# Altium PCB EUS1_Outline_5_trial07.PcbDoc (part 2 of 3)
Units mm, origin at the board's own origin, x right, y up, seen from the top; angles counter-clockwise.
Board outline 95.45 x 90.3 mm, 6 copper layers (Top Layer, Routing 1, GND, EPS_VCC, Routing 2, Bottom Layer), stack 2.257 mm thick; 247 components, 187 nets, 935 pads, 315 vias.
Unrouted connection lines stored in the file: 34.
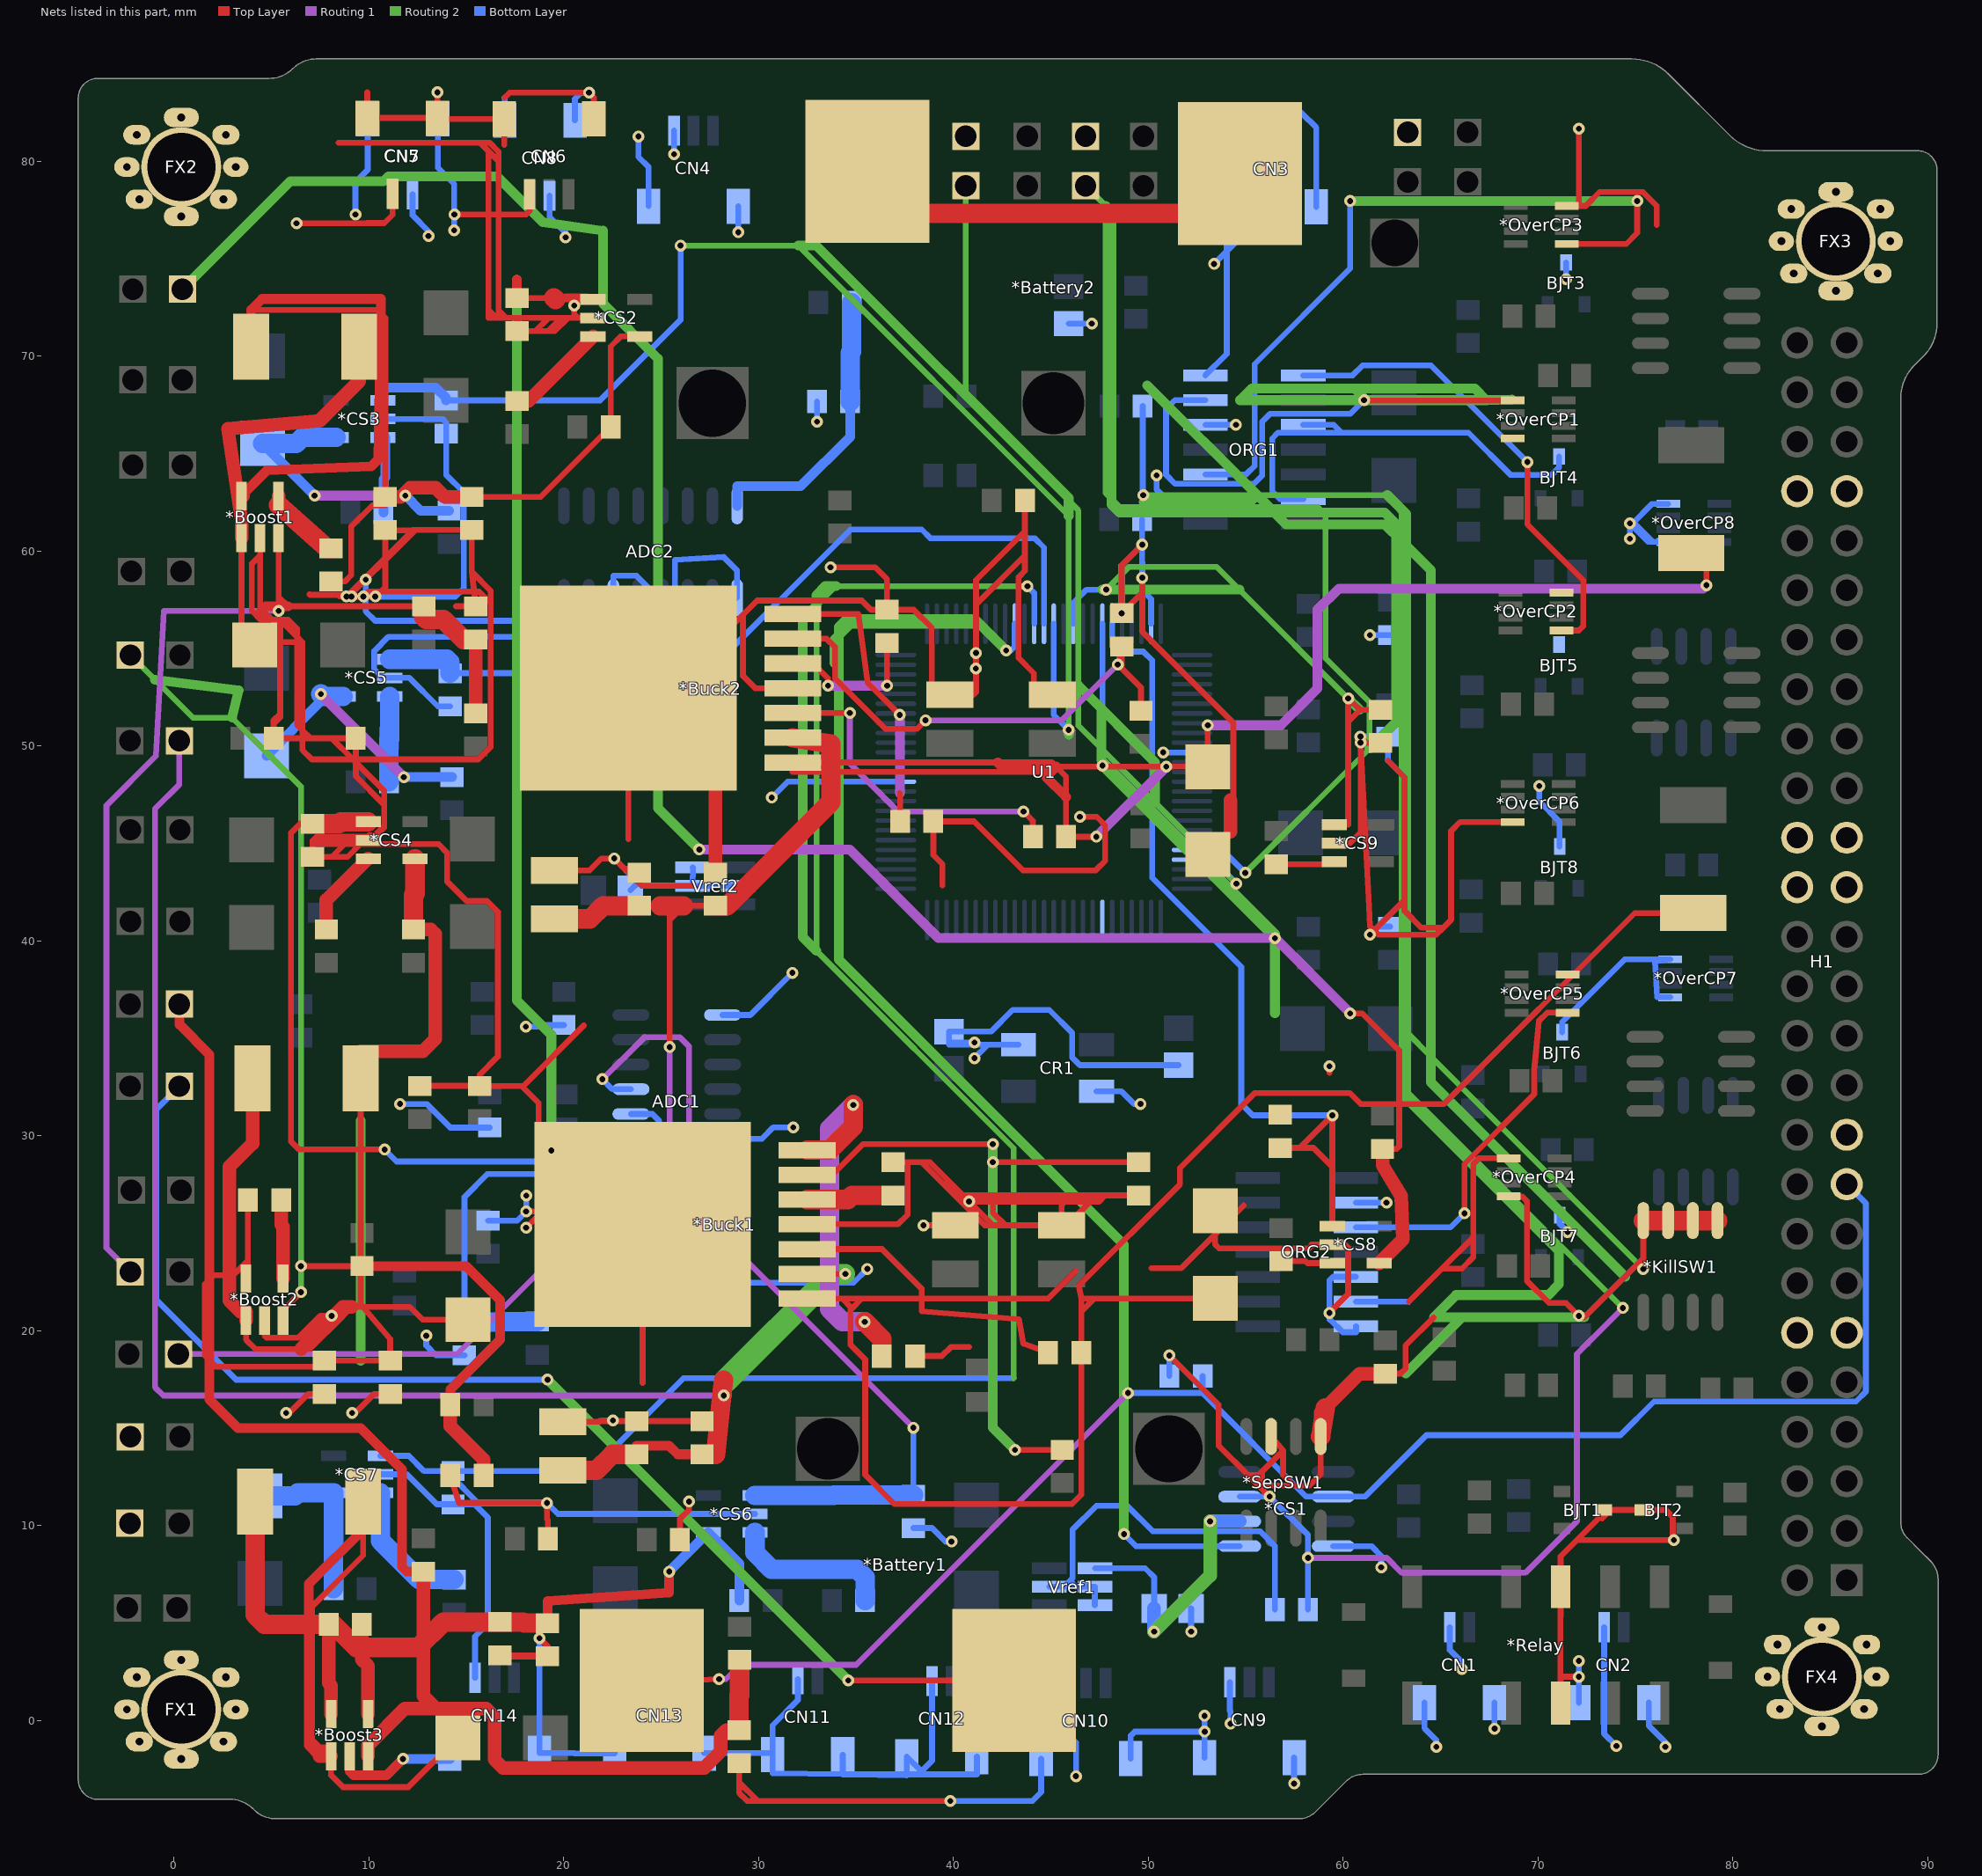
[diagram p6: the nets of this part, all layers, seen from the top]

## Via types
v1: diameter 0.61, hole 0.305, Top Layer to Bottom Layer, 314 vias
v2: diameter 0.61, hole 0.3, Top Layer to Bottom Layer, 1 vias

## Nets (pads, with @x,y where several pads share a name; then routed paths per layer and width w, separated by ;. In a path a pad name is that pad's centre, name@x,y a point inside that pad or via, vN(x,y) a via of type N, cw(c..) or ccw(c..) an arc to the next point about the centre after c; other vN are vias at no path point) (continued)
GND: *Boost1.2 *Boost2.2 *Boost3.2 *Buck1.4 *Buck1.8 *Buck2.4 *Buck2.8 *CS1.4 *CS2.2 *CS3.2 *CS4.2 *CS5.2 *CS6.2 *CS7.2 *CS8.2 *CS9.2 *OverCP1.4 *OverCP2.4 *OverCP3.4 *OverCP4.4 *OverCP5.4 *OverCP6.4 *OverCP7.1 *OverCP7.4 *OverCP8.1 *OverCP8.4 *Relay.4 *Relay.9 ADC1.9 ADC1.14 ADC2.9 ADC2.14 BJT1.3 BJT2.3 BJT3.3 BJT4.3 BJT5.3 BJT6.3 BJT7.3 BJT8.3 C1.1 C2.1 C3.1 C4.1 C5.1 C6.1 C7.1 C9.1 C10.1 C11.1 C12.1 C13.1 C15.1 C16.1 C17.1 C18.1 C19.1 C21.2 C22.1 C23.1 C24.2 C25.2 C27.1 C28.2 C29.1 C30.1 C31.2 C32.2 C34.1 C35.1 C36.1 C37.1 C38.1 CN1.2 CN1.3 CN1.4 CN2.2 CN2.3 CN2.4 CN3.3 CN3.4 CN3.5 CN4.3 CN4.4 CN4.5 CN5.2 CN5.3 CN5.4 CN6.3 CN6.4 CN6.5 CN7.2 CN7.3 CN7.4 CN8.2 CN8.3 CN8.4 CN9.3 CN9.4 CN9.5 CN10.3 CN10.4 CN10.5 CN11.2 CN11.3 CN11.4 CN12.2 CN12.3 CN12.4 CN13.3 CN13.4 CN13.5 CN14.3 CN14.4 CN14.5 CR1.2 CR1.4 D17.1 D18.1 FX1.1 FX1.2 FX1.3 FX1.4 FX1.5 FX1.6 FX1.7 FX1.8 FX1.9 FX2.1 FX2.2 FX2.3 FX2.4 FX2.5 FX2.6 FX2.7 FX2.8 FX2.9 FX3.1 FX3.2 FX3.3 FX3.4 FX3.5 FX3.6 FX3.7 FX3.8 FX3.9 FX4.1 FX4.2 FX4.3 FX4.4 FX4.5 FX4.6 FX4.7 FX4.8 FX4.9 H1.11 H1.12 H1.19 H1.29 H1.30 H1.31 H1.32 H1.45 H1.46 ORG1.2 ORG1.5 ORG1.7 ORG1.10 ORG1.13 ORG2.2 ORG2.5 ORG2.7 R10.2 R15.2 R18.2 R22.2 R24.2 R27.2 R29.2 R32.2 R36.2 R38.2 R41.2 R43.2 R46.2 R50.2 R52.2 R55.2 R62.2 R63.2 R68.2 R72.2 R73.2 R78.2 R79.1 U1.11 U1.32 U1.62 U1.81 U1.99 Vref1.2 Vref1.3 Vref1.5 Vref2.2 Vref2.3 Vref2.5 W2.1 W4.1 W16.2 W18.2 W19.2 | length 1002.7
  Top Layer w0.3: *Boost1.2@4.42,60.672 4.42,59.771 ; *Boost2.2@4.648,20.515 4.648,19.74 4.75,19.639 6.397,19.639 7.515,20.756 v1(8.095,20.756) ; v1(5.763,15.778) 5.93,15.778 6.903,16.751 C9.1@7.722,16.751 ; v1(6.291,76.814) 10.792,76.814 10.818,76.84 ; 8.45,80.954 15.689,80.954 ; 8.501,57.675 8.501,57.739 ; v1(9.141,15.778) 9.308,15.778 10.281,16.751 C10.1@11.1,16.751 ; 9.924,76.84 10.818,76.84 ; CN5.4@9.924,82.202 CN5.4@9.924,82.224 ; 9.924,83.534 CN5.4@9.924,82.224 ; *CS4.2@9.976,45.161 *CS4.2@9.767,45.161 ; C3.1@10.846,61.074 C3.1@10.846,61.066 ; CN5.2@11.224,78.327 11.224,77.246 10.818,76.84 ; v1(13.524,83.534) CN5.3@13.524,82.224 ; R36.2@14.186,12.573 14.623,11.155 v1(19.144,11.155) 19.144,10.338 19.19,10.292 C18.1@19.19,9.322 ; v1(14.394,77.271) 16.147,77.271 ; 14.465,57.163 R22.2@15.494,57.163 15.407,57.917 ; 16.95,80.845 CN6.5@16.95,82.174 ; CN6.5@16.95,82.176 CN6.5@16.95,82.174 ; 16.981,83.262 17.239,83.52 v1(21.303,83.52) 21.55,83.272 CN6.4@21.55,82.176 ; v1(18.077,25.278) 18.712,25.913 *Buck1.8@18.712,26.116 ; v1(18.077,26.116) *Buck1.8@18.712,26.116 ; CN6.3@18.25,78.302 18.25,77.449 18.073,77.271 16.655,77.271 ; v1(18.756,4.221) 19.177,3.8 C16.1@19.177,3.34 ; C28.2@19.533,43.612 21.328,43.612 21.942,44.226 v1(22.598,44.226) 23.132,43.693 ; C21.2@19.964,15.316 21.798,15.316 ; v1(20.541,72.598) 20.541,72.166 20.749,71.958 ; 21.049,35.666 17.933,32.55 17.848,32.55 ; *CS2.2@21.508,71.958 20.749,71.958 ; v1(22.533,15.392) 21.917,15.392 21.879,15.354 ; 23.317,45.222 *Buck2.8@23.317,52.959 27.788,52.959 27.788,55.308 29.202,56.723 ; C29.1@23.829,42.996 23.601,43.223 C29.1@23.876,43.497 ; 24.054,17.31 *Buck1.8@24.054,25.451 24.054,26.116 *Buck1.8@18.712,26.116 ; C19.1@25.972,9.271 25.972,10.341 26.441,10.811 v1(26.441,11.23) ; 26.619,42.824 24,42.824 C29.1@23.327,43.497 ; R50.2@29.007,-2.197 29.007,-3.17 ; *Buck2.4@31.763,52.959 29.837,52.959 29.202,53.594 29.202,56.723 ; *Buck1.4@32.499,25.451 37.152,25.451 37.66,25.959 37.66,28.537 37.559,28.638 ; v1(33.698,59.161) 35.992,59.161 36.601,58.552 R72.2@36.601,56.985 ; R62.2@36.906,28.638 37.559,28.638 ; C27.1@38.037,18.694 39.413,18.694 39.875,19.156 40.81,19.156 ; v1(38.468,25.4) C24.2@40.107,25.4 ; 39.446,42.847 39.446,43.926 38.976,44.396 C34.1@38.976,46.126 41.064,46.126 43.574,43.616 47.312,43.616 47.795,44.099 47.795,45.928 47.363,46.36 v1(46.5,46.36) ; v1(39.845,-4.136) 29.972,-4.136 ; R79.1@43.675,62.586 43.675,61.015 ; C32.2@45.085,52.629 44.137,52.629 44.137,53.726 43.35,54.513 43.35,58.658 43.675,58.983 43.675,59.771 ; R63.2@49.505,26.937 47.795,26.937 ; 49.695,57.861 v1(48.641,56.807) 48.641,59.272 v1(49.695,60.326) ; v1(49.7,58.628) 49.7,55.859 54.374,51.186 54.374,45.748 54.221,45.596 D18.1@53.061,44.435 ; 50.157,23.195 51.681,23.195 53.442,24.955 ; D17.1@53.442,26.151 53.442,24.955 ; 54.907,26.421 53.442,24.955 ; R68.2@56.769,31.077 R68.2@57.15,31.077 ; 58.373,24.409 58.453,24.409 ; v1(59.301,20.909) 60.266,21.874 60.266,24.257 60.114,24.409 *CS8.2@59.455,24.409 58.453,24.409 ; 59.301,33.228 v1(59.301,33.558) ; *CS9.2@59.557,45.009 60.363,45.009 60.901,45.547 v1@60.901,50.058 ; v1(60.897,50.482) 61.227,50.152 ; v1(60.901,50.17) v1@60.901,50.152 ; v1(61.379,40.314) 61.597,40.533 ; R78.2@61.925,50.152 61.227,50.152 ; 62.306,49.247 63.157,48.397 63.157,42.092 ; *OverCP4.4@68.515,26.889 69.196,26.889 69.436,26.649 69.436,22.56 70.579,21.417 71.442,21.417 v1(72.103,20.756) ; *OverCP6.4@68.718,46.091 66.007,46.091 65.55,45.634 65.55,41.076 65.143,40.67 ; *OverCP3.4@71.49,77.708 72.103,77.708 ; v1(72.103,2.24) 71.29,2.24 71.171,2.121 *Relay.4@71.171,0.889 71.163,0.889 71.163,5.331 71.171,5.339 *Relay.9@71.171,6.858 71.171,8.412 72.009,9.25 ; v1(72.103,81.666) 72.103,77.708 ; 76.103,76.733 76.103,77.708 75.395,78.417 73.168,78.417 72.459,77.708 72.103,77.708 ; 4.42,57.096 5.047,56.469 ; 4.42,57.096 4.42,56.926 4.877,56.469 ; 4.42,57.096 4.42,59.771 ; 4.42,59.771 4.005,59.357 4.005,56.926 4.463,56.469 4.877,56.469 ; 4.877,56.469 5.047,56.469 ; 5.047,56.469 5.453,56.469 ; 5.047,56.469 5.453,56.062 5.453,55.326 ; 5.118,51.135 5.453,51.47 5.453,51.648 ; 5.118,51.135 C7.1@5.118,50.394 6.596,50.394 ; 5.118,51.135 5.118,51.313 5.453,51.648 ; 5.453,51.648 5.453,55.326 ; 5.453,55.326 6.317,55.326 ; 5.453,56.469 6.317,55.605 ; 5.453,56.469 5.86,56.469 6.317,56.012 6.317,55.605 ; 6.317,55.326 6.596,55.326 ; 6.317,55.326 6.317,51.084 6.596,50.805 ; 6.317,55.326 6.317,55.605 ; 6.317,55.605 6.596,55.326 ; 6.596,50.394 6.596,49.789 7.079,49.306 9.187,49.306 ; 6.596,50.394 6.596,50.805 ; 6.596,50.394 7.007,50.394 ; 6.596,50.805 6.596,55.326 ; 6.596,50.805 7.007,50.394 ; 6.977,57.764 6.952,57.79 6.952,57.764 6.977,57.764 ; 6.977,57.764 7.003,57.739 8.501,57.739 ; 6.977,57.764 8.501,57.764 ; 7.007,50.394 8.099,50.394 ; 7.112,44.836 R32.2@7.112,44.31 8.107,44.31 ; 7.112,44.836 7.239,44.963 8.76,44.963 ; 7.112,44.836 7.112,44.937 ; 7.112,44.937 7.336,45.161 8.958,45.161 ; 7.112,44.937 7.112,45.14 7.315,45.344 *CS4.2@9.949,45.344 ; 8.099,50.394 C6.1@9.335,50.394 9.335,49.306 ; 8.099,50.394 9.187,49.306 ; 8.107,44.31 8.916,44.31 *CS4.2@9.568,44.963 ; 8.107,44.31 8.76,44.963 ; 8.501,57.739 8.501,57.764 ; 8.501,57.739 v1@8.933,57.739 ; 8.501,57.764 v1@8.958,57.764 ; 8.76,44.963 *CS4.2@9.568,44.963 ; 8.76,44.963 8.958,45.161 ; v1@8.933,57.739 v1@9.035,57.739 ; v1@8.933,57.739 v1(8.857,57.663) v1(9.111,57.663) ; v1@8.933,57.739 v1@8.958,57.764 ; 8.958,45.161 *CS4.2@9.767,45.161 ; v1@8.958,57.764 v1@9.009,57.764 ; v1@8.958,57.764 v1@8.984,57.79 ; v1@8.984,57.79 v1@9.009,57.764 ; v1@8.984,57.79 v1@9.788,58.594 ; v1@9.009,57.764 v1@9.077,57.764 ; v1@9.009,57.764 v1@9.035,57.739 ; v1@9.035,57.739 9.052,57.739 v1@9.077,57.764 ; v1@9.035,57.739 v1(9.111,57.663) ; v1@9.077,57.764 v1(9.847,58.534) ; v1(9.111,57.663) v1(9.72,57.663) ; 9.187,49.306 9.335,49.158 ; 9.187,49.306 9.335,49.306 ; 9.335,49.158 10.787,47.706 10.787,46.99 ; 9.335,49.158 9.335,48.442 10.787,46.99 ; 9.335,49.158 9.335,49.306 ; 9.335,49.306 15.613,49.306 16.248,49.941 16.248,57.332 ; *CS4.2@9.568,44.963 *CS4.2@9.767,45.161 ; *CS4.2@9.568,44.963 13.581,44.963 14.013,44.531 14.013,43.058 15.029,42.042 16.07,42.042 16.629,41.483 16.629,34.066 15.697,33.134 C13.1@15.697,32.567 ; v1(9.72,57.663) 9.974,57.917 10.617,57.917 ; v1(9.72,57.663) v1(10.33,57.663) 10.363,57.663 10.617,57.917 ; *CS4.2@9.767,45.161 *CS4.2@9.949,45.344 ; v1@9.788,58.594 v1(9.847,58.534) ; v1@9.788,58.594 10.846,59.652 ; v1(9.847,58.534) 10.846,59.533 ; CN5.4@9.924,82.224 CN5.3@13.524,82.224 ; *CS4.2@9.949,45.344 10.025,45.42 10.33,45.42 10.787,45.877 ; *CS4.2@9.949,45.344 10.33,45.344 10.787,45.801 10.787,45.877 ; 10.617,57.917 10.846,58.145 10.846,59.533 ; 10.617,57.917 15.407,57.917 ; 10.787,45.877 10.787,46.99 ; 10.846,59.533 12.379,61.066 ; 10.846,59.533 10.846,59.652 ; 10.846,59.652 12.26,61.066 ; 10.846,59.652 C3.1@10.846,61.066 ; C3.1@10.846,61.066 12.26,61.066 ; 12.26,61.066 12.268,61.074 12.387,61.074 ; 12.26,61.066 12.379,61.066 ; 12.379,61.066 12.387,61.074 ; 12.387,61.074 C4.1@15.291,61.074 15.291,58.925 ; CN5.3@13.524,82.224 CN5.3@13.524,82.202 13.524,82.174 CN6.5@16.95,82.174 ; 15.291,58.925 16.248,57.967 16.248,57.332 ; 15.291,58.925 15.407,57.917 ; 15.407,57.917 15.664,57.917 16.248,57.332 ; 15.689,80.954 16.147,80.497 16.147,77.271 ; 15.689,80.954 15.715,80.954 ; C13.1@15.697,32.55 C13.1@15.697,32.567 ; C13.1@15.697,32.55 C12.1@12.624,32.55 12.624,32.567 C13.1@15.697,32.567 ; C13.1@15.697,32.55 17.848,32.55 ; 15.715,80.954 16.655,80.015 ; 15.715,80.954 16.197,80.954 16.655,80.497 16.655,80.015 ; 16.147,72.369 16.558,71.958 ; 16.147,72.369 16.147,71.963 16.151,71.958 16.558,71.958 ; 16.147,72.369 16.147,77.271 ; 16.147,77.271 16.655,77.271 ; 16.558,71.958 16.659,71.958 ; 16.655,72.369 17.066,71.958 ; 16.655,72.369 16.655,71.963 16.659,71.958 ; 16.655,72.369 16.655,77.271 ; 16.655,77.271 16.655,80.015 ; 16.659,71.958 17.066,71.958 ; 17.066,71.958 17.747,71.958 ; 17.747,71.958 17.602,71.814 R18.2@17.602,71.285 18.547,71.285 ; 17.747,71.958 19.22,71.958 ; 17.848,32.55 18.712,31.686 *Buck1.8@18.712,26.116 ; 18.547,71.285 19.22,71.958 ; 18.547,71.285 19.207,71.285 ; C16.1@19.177,3.34 C16.1@19.177,3.289 19.177,3.281 16.739,3.281 C15.1@16.739,3.34 C16.1@19.177,3.34 ; 19.207,71.285 19.88,71.958 ; 19.207,71.285 19.537,71.285 20.211,71.958 ; 19.22,71.958 19.88,71.958 ; 19.88,71.958 20.211,71.958 ; 20.211,71.958 20.749,71.958 ; 21.798,15.316 21.836,15.354 21.879,15.354 ; 21.798,15.316 21.841,15.316 21.879,15.354 ; 21.879,15.354 C22.1@23.749,15.354 ; 23.132,43.693 C29.1@23.327,43.497 ; 23.132,43.693 23.876,43.693 C29.1@23.876,43.497 ; C29.1@23.327,43.497 C29.1@23.876,43.497 ; C22.1@23.749,15.354 C23.1@27.102,15.354 27.102,15.372 23.749,15.372 C22.1@23.749,15.354 ; 29.007,-3.17 29.972,-4.136 ; 29.007,-3.17 29.007,-3.712 29.431,-4.136 29.972,-4.136 ; 29.202,56.723 29.939,57.459 35.304,57.459 35.778,56.985 R72.2@36.601,56.985 ; R72.2@36.601,56.985 37.965,56.985 38.905,56.045 38.905,52.629 C31.2@39.827,52.629 41.034,52.629 41.166,52.76 v1(41.166,54.767) 41.166,57.261 ; 37.559,28.638 38.372,28.638 ; 38.372,28.638 40.073,26.937 ; 38.372,28.638 38.795,28.638 40.497,26.937 ; 40.073,26.937 40.497,26.937 ; 40.073,26.937 41.61,25.4 42.034,25.4 ; 40.497,26.937 v1(40.81,26.624) ; 40.497,26.937 46.05,26.937 ; v1(40.81,26.624) 42.034,25.4 ; v1(40.81,26.624) 42.034,26.624 ; 41.166,57.261 43.675,59.771 ; 41.166,57.261 41.166,58.506 43.675,61.015 ; 42.034,25.4 42.673,25.4 ; 42.034,26.624 42.034,26.04 42.673,25.4 ; 42.034,26.624 45.738,26.624 ; 42.673,25.4 C25.2@45.56,25.4 ; 43.675,59.771 43.675,61.015 ; C25.2@45.56,25.4 C25.2@45.568,25.4 45.814,25.4 47.038,26.624 ; C25.2@45.56,25.4 45.56,26.446 45.738,26.624 ; 45.738,26.624 46.05,26.937 ; 45.738,26.624 47.038,26.624 ; 46.05,26.937 47.35,26.937 ; 47.038,26.624 47.35,26.937 ; 47.038,26.624 47.177,26.624 ; 47.177,26.624 47.49,26.937 ; 47.177,26.624 47.482,26.624 47.795,26.937 ; 47.35,26.937 47.49,26.937 ; 47.49,26.937 47.795,26.937 ; 53.442,24.955 53.442,24.414 53.639,24.216 58.26,24.216 58.453,24.409 ; v1@60.901,50.058 61.332,41.742 61.384,40.746 61.597,40.533 ; v1@60.901,50.058 60.897,50.152 v1@60.901,50.152 ; v1@60.901,50.058 v1@60.901,50.152 ; v1@60.901,50.152 61.227,50.152 ; 61.597,40.533 61.816,40.314 64.788,40.314 65.143,40.67 ; 61.597,40.533 63.157,42.092 ; 63.157,42.092 63.157,41.539 64.026,40.67 65.143,40.67 ; 72.009,9.25 v1(76.98,9.25) 76.929,9.301 76.929,10.439 76.573,10.795 BJT2.3@75.379,10.795 BJT1.3@73.728,10.795 ; 72.009,9.25 73.209,10.45 ; 73.209,10.45 BJT1.3@73.554,10.795 ; 73.209,10.45 73.195,10.465 73.195,10.795 BJT1.3@73.389,10.795 BJT1.3@73.554,10.795 ; 73.209,10.45 73.297,10.363 BJT1.3@73.728,10.795 ; BJT1.3@73.554,10.795 BJT1.3@73.728,10.795
  Top Layer w0.5: *Boost3.2@9.017,-1.837 9.017,-2.612 9.22,-2.815 10.914,-2.815 v1(11.752,-1.977)
  Top Layer w0.7: C30.1@27.788,43.497 *Buck2.8@27.788,52.959 ; 54.221,45.596 54.221,47.23
  Bottom Layer w0.3: v1(9.314,77.273) 9.314,78.932 9.946,79.563 CN7.3@9.946,82.176 ; v1(9.847,58.534) 9.847,56.901 10.33,56.418 18.864,56.418 22.555,56.654 ADC2.14@22.555,57.619 22.555,58.729 23.741,58.729 24.3,58.171 24.3,56.926 ; v1(10.33,57.663) 14.445,57.663 14.877,58.094 14.877,63.004 13.97,63.911 R27.2@13.97,66.027 13.97,66.591 13.784,66.777 *CS3.2@10.725,66.777 ; *CS7.2@10.598,12.624 11.956,12.624 13.492,11.087 R55.2@14.326,11.087 15.427,11.087 16.108,10.407 16.108,4.958 15.456,4.306 CN14.3@15.456,2.191 ; v1(11.605,31.628) 12.974,31.628 14.185,30.416 R38.2@16.205,30.416 ; CN7.2@12.246,78.302 12.246,77.229 13.066,76.408 v1(13.066,76.165) ; v1(12.951,19.74) 12.951,19.234 13.452,18.732 R43.2@14.91,18.732 ; CN7.4@13.546,82.176 13.546,79.668 14.387,78.827 v1(14.387,76.46) ; R41.2@14.173,52.032 13.548,52.032 12.087,53.492 *CS5.2@11.081,53.492 10.711,53.492 10.281,53.923 10.281,54.869 11.014,55.602 23.589,55.602 24.3,56.313 24.3,56.926 ; 14.186,12.573 15.604,11.155 v1(19.144,11.155) 19.707,10.592 *CS6.2@29.826,10.592 ; R24.2@16.129,25.641 17.618,25.641 18.088,26.111 v1(18.088,26.924) ; CN8.3@16.981,82.1 16.981,83.262 ; v1(18.057,35.59) 18.668,35.59 18.752,35.674 R52.2@20.015,35.674 ; v1(18.756,4.221) CN14.4@18.756,-1.684 20.553,-1.684 20.566,-1.697 22.615,-1.697 CN13.5@22.615,-1.684 22.615,-1.321 23.915,-0.021 CN13.3@23.915,2.191 ; CN8.2@19.281,78.225 19.281,77.153 20.102,76.332 v1(20.102,76.089) ; CN8.4@20.581,82.1 20.581,83.205 20.896,83.52 v1(21.303,83.52) ; v1(22.598,44.226) C35.1@23.829,42.996 ; C35.1@23.429,42.596 C35.1@23.829,42.996 ; v1(23.843,81.274) 23.843,80.222 24.367,79.697 CN4.5@24.367,77.691 ; v1(25.667,80.359) CN4.3@25.667,81.566 ; Vref2.3@26.619,43.774 26.637,43.774 26.637,43.312 26.619,43.294 Vref2.2@26.619,42.824 ; CN13.4@27.215,-1.684 27.215,-1.672 CN11.4@30.727,-1.672 ; ADC1.14@28.156,29.845 30.183,29.845 30.767,30.429 v1(31.789,30.429) ; ADC1.9@28.156,36.195 29.579,36.195 v1(31.742,38.359) ; R29.2@28.346,22.695 29.303,22.695 29.541,22.456 34.879,22.456 v1(35.588,23.165) ; ADC2.9@28.905,57.619 28.905,59.001 28.212,59.695 25.722,59.542 25.722,56.926 25.291,56.494 24.732,56.494 24.3,56.926 ; Vref2.5@28.956,42.824 Vref2.2@26.619,42.824 ; v1(28.967,76.359) CN4.4@28.967,77.691 ; v1(30.679,47.346) 31.5,48.166 U1.62@37.053,48.166 ; CN11.2@32.027,2.115 32.027,1.046 30.727,-0.254 CN11.4@30.727,-1.672 ; v1(33.007,66.637) R15.2@33.007,67.666 ; CN11.3@34.327,-1.76 34.327,-2.766 ; R46.2@37.948,9.868 38.906,9.868 39.6,9.174 v1(39.906,9.174) ; CN12.2@38.91,2.013 38.91,-2.073 38.372,-2.612 CN12.4@37.61,-1.862 37.61,-2.77 ; v1(39.845,-4.136) 44.061,-4.136 44.509,-3.687 CN10.5@44.509,-1.963 ; v1(41.084,33.979) 41.776,34.671 ; v1(41.089,34.777) C37.1@39.776,34.777 ; v1(41.153,53.972) U1.81@41.153,56.266 ; CN12.3@41.21,-1.862 41.21,-2.77 37.61,-2.77 ; CR1.2@43.346,34.671 41.776,34.671 ; Vref1.5@44.933,6.858 45.687,6.858 45.992,7.163 ; CN10.3@45.809,1.912 45.809,-0.649 46.296,-1.136 v1(46.296,-2.867) ; C36.1@45.923,71.669 v1(47.105,71.669) ; Vref1.3@47.269,5.908 47.262,5.908 Vref1.2@47.262,6.858 ; Vref1.2@47.269,6.858 Vref1.2@47.262,6.858 ; CR1.4@47.346,32.271 48.632,32.271 49.275,31.628 v1(49.607,31.628) ; v1(48.641,56.807) 48.641,59.272 v1(49.695,60.326) R10.2@49.695,61.62 49.697,60.326 v1(49.7,58.628) 49.7,57.989 50.153,57.536 U1.99@50.153,56.266 ; CN10.4@49.109,-1.963 49.109,-0.783 49.313,-0.58 v1@52.891,-0.58 ; v1(50.429,63.881) 50.429,63.163 50.93,62.662 ORG1.2@52.934,62.662 ; v1(50.771,49.666) U1.11@52.253,49.666 ; C38.1@51.562,33.619 46.5,33.619 46.093,34.026 46.093,35.285 44.925,36.454 43.045,36.454 41.933,35.342 C37.1@39.776,35.342 C37.1@39.776,34.777 ; v1(52.207,4.559) C2.1@52.207,5.74 ; CN9.5@52.891,-1.912 v1@52.891,-0.58 ; v1(52.891,0.232) v1@52.891,-0.58 ; v1(52.9,-0.58) v1@52.891,-0.58 ; ORG1.5@52.934,66.472 v1(54.508,66.472) ; ORG1.7@52.934,69.012 54.034,70.113 54.034,75.383 ; v1(53.383,74.731) 54.034,75.383 ; CN9.3@54.191,1.962 54.191,0.494 54.221,0.465 v1(54.221,-0.174) ; C1.1@56.502,5.69 56.502,8.945 55.74,9.707 50.233,9.707 48.938,11.003 47.338,11.003 46.119,9.784 46.119,7.29 45.992,7.163 ; v1(57.491,-3.244) CN9.4@57.491,-1.912 ; ORG1.13@57.963,62.662 56.761,62.662 56.37,63.053 56.37,65.78 56.66,66.07 59.936,66.07 ; ORG1.10@57.963,66.472 59.534,66.472 59.936,66.07 ; CN3.4@58.634,77.666 58.634,81.723 57.879,82.478 57.472,82.478 56.787,81.793 56.787,80.091 ; *CS1.4@59.499,8.941 61.46,8.941 61.961,8.44 v1(61.961,7.853) ; ORG2.7@60.655,20.218 60.673,20.218 60.673,19.918 59.987,19.918 59.352,20.553 59.301,20.553 v1(59.301,20.909) 59.301,22.555 59.504,22.758 ORG2.5@60.655,22.758 ; ORG2.2@60.655,26.568 v1(62.23,26.568) ; v1(60.897,50.482) C5.1@62.306,50.482 62.306,49.247 63.157,48.397 63.157,42.092 61.794,40.729 ; v1(61.379,40.314) 61.794,40.729 ; v1(61.379,55.689) C17.1@62.408,55.689 ; C11.1@62.408,40.729 61.794,40.729 ; CN1.4@64.178,0.907 64.178,-0.397 64.788,-1.006 v1(64.788,-1.355) ; CN1.2@65.478,4.782 65.478,3.614 66.108,2.984 v1(66.108,2.645) ; v1(67.778,-0.425) CN1.3@67.778,0.907 ; v1(70.071,47.947) 70.071,47.157 71.12,46.108 BJT8.3@71.12,44.839 ; BJT4.3@71.095,64.854 71.095,64.292 70.714,63.911 68.598,63.911 66.439,66.07 59.936,66.07 ; BJT7.3@71.12,25.916 71.12,25.466 v1(71.526,25.059) ; BJT6.3@71.247,35.314 71.247,35.832 74.465,39.05 *OverCP7.4@76.795,39.05 76.014,38.943 76.13,37.1 *OverCP7.1@76.795,37.1 ; v1(71.45,73.954) BJT3.3@71.45,74.811 ; CN2.4@72.103,0.907 v1(72.103,3.052) ; CN2.2@73.403,4.782 73.403,-0.687 v1(74.033,-1.317) ; v1(74.722,60.63) 74.722,61.276 v1@74.793,61.348 ; CN2.3@75.703,0.907 75.703,-0.28 76.545,-1.122 v1(76.545,-1.355) ; *OverCP8.1@76.693,60.468 75.913,60.468 ; *OverCP8.4@76.693,62.418 75.863,62.418 v1@74.867,61.422 ; C35.1@23.829,42.996 24,42.824 Vref2.2@26.619,42.824 ; CN11.4@30.727,-1.672 CN11.4@30.727,-1.76 30.727,-2.713 34.312,-2.766 34.327,-2.766 ; 34.327,-2.766 34.602,-2.77 ; 34.327,-2.766 34.327,-2.77 34.602,-2.77 ; 34.602,-2.77 37.596,-2.815 37.61,-2.815 37.61,-2.77 ; 34.602,-2.77 37.61,-2.77 ; C37.1@39.776,34.777 39.776,34.671 41.776,34.671 ; 45.992,7.163 46.296,6.858 Vref1.2@47.262,6.858 ; 54.034,75.383 CN3.5@54.034,77.666 54.034,78.668 55.05,79.684 56.38,79.684 56.787,80.091 ; 54.034,75.383 56.787,78.135 56.787,80.091 ; v1@74.793,61.348 v1(74.719,61.422) v1@74.867,61.422 ; v1@74.793,61.348 75.673,60.468 75.913,60.468 ; v1@74.793,61.348 v1@74.867,61.422 ; v1@74.867,61.422 74.959,61.422 75.913,60.468
  Bottom Layer w0.5: v1(11.752,-1.977) 14.156,-1.977 CN14.5@14.156,-1.684
ISA_X: *CS2.1 ADC1.3 R18.1 | length 56.6
  Top Layer w0.3: R18.1@17.602,72.987 19.499,72.987 20.016,72.987 20.098,73.069 21.19,73.069 *CS2.1@21.351,72.908 ; 19.578,72.908 *CS2.1@21.351,72.908 ; *CS2.1@21.508,72.908 *CS2.1@21.351,72.908
  Top Layer w0.5: R18.1@17.602,72.987 17.602,73.911
  Top Layer w1: 19.499,72.987 19.578,72.908
  Routing 2 w0.5: 17.602,73.911 17.594,73.911 17.594,36.936 19.372,35.158 v1(19.372,29.241)
  Bottom Layer w0.5: v1(19.372,29.241) 20.953,29.241 21.557,29.845 ADC1.3@23.456,29.845
ISA_Y: *CS4.1 ADC1.4 R32.1 | length 45.7
  Top Layer w0.3: R32.1@7.112,46.012 6.477,46.012 6.012,45.547 6.012,29.697 6.418,29.291 v1(10.813,29.291)
  Top Layer w1: R32.1@7.112,46.012 8.476,46.012 8.575,46.111 *CS4.1@9.976,46.111
  Bottom Layer w0.3: v1(10.813,29.291) 11.425,28.679 19.426,28.679 21.608,26.497 24.148,26.497 24.91,27.259 24.91,30.759 24.554,31.115 ADC1.4@23.456,31.115
ISA_Z: *CS6.1 ADC1.5 R46.1 | length 43.1
  Routing 1 w0.3: v1(21.989,32.898) 24.138,35.047 25.97,35.047 26.443,34.574 26.443,26.521 v1(37.948,15.016)
  Bottom Layer w0.3: v1(21.989,32.898) 22.501,32.385 ADC1.5@23.456,32.385 ; R46.1@37.948,11.57 v1(37.948,15.016)
  Bottom Layer w1: *CS6.1@29.826,11.542 33.85,11.542 33.878,11.57 R46.1@37.948,11.57
LOAD1_STATUS: *OverCP3.1 ORG1.3 | length 38.5
  Top Layer w0.3: *OverCP3.1@71.49,75.758 74.541,75.758 75.1,76.317 v1(75.1,77.957)
  Routing 2 w0.5: v1(60.368,77.957) v1(75.1,77.957)
  Bottom Layer w0.3: ORG1.3@52.934,63.932 55.034,63.932 55.466,64.364 55.466,69.595 60.368,74.498 v1(60.368,77.957)
LOAD2_STATUS: *OverCP1.1 ORG1.6 | length 54.9
  Top Layer w0.3: v1(61.079,67.746) 61.099,67.726 67.38,67.726 *OverCP1.1@68.718,67.726
  Routing 2 w0.5: 67.38,67.726 67.364,67.742 ; 68.668,67.776 67.364,67.742 ; 60.592,68.339 55.318,68.339 54.72,67.742 v1@61.19,67.742 ; 60.592,68.339 66.766,68.339 67.364,67.742 ; 60.592,68.339 v1@61.19,67.742 ; v1@61.19,67.742 67.364,67.742
  Bottom Layer w0.3: ORG1.6@52.934,67.742 51.376,67.742 50.919,67.285 50.919,63.911 51.376,63.454 55.44,63.454 55.847,63.86 55.847,66.629 56.253,67.035 60.368,67.035 v1(61.079,67.746)
LOAD3_STATUS: *OverCP2.1 ORG1.8 | length 24.6
  Top Layer w0.3: v1(69.464,64.569) 69.464,61.369 72.331,58.501 72.331,56.15 72.103,55.921 *OverCP2.1@71.211,55.921
  Bottom Layer w0.3: ORG1.8@57.963,69.012 60.49,69.012 61.003,69.524 64.508,69.524 v1(69.464,64.569)
LOAD5_STATUS: *OverCP5.1 ORG2.3 | length 18.9
  Top Layer w0.3: v1(66.235,26.014) 66.235,28.554 69.817,32.136 69.817,33.355 70.045,35.88 70.477,36.312 *OverCP5.1@71.541,36.312
  Bottom Layer w0.3: ORG2.3@60.655,25.298 65.52,25.298 v1(66.235,26.014)
LOAD6_STATUS: *OverCP4.1 ORG2.6 | length 16
  Top Layer w0.3: 63.386,21.488 63.391,21.493 65.077,23.18 ; *OverCP4.1@68.515,28.839 66.972,28.839 66.693,28.559 66.693,24.795 ; 65.077,23.18 66.101,23.18 66.693,23.771 66.693,24.795 ; 65.077,23.18 66.693,24.795
  Bottom Layer w0.3: ORG2.6@60.655,21.488 63.386,21.488
M_VSA_X: ADC2.8 R14.2 R15.1 | length 14.8
  Bottom Layer w0.5: ADC2.8@28.905,62.319 28.905,63.327 32.169,63.327 34.709,65.867 R15.1@34.709,67.666
  Bottom Layer w1: R15.1@34.709,67.666 34.709,70.159 34.785,70.236 R14.2@34.785,72.746
M_VSA_Y: ADC1.1 R28.2 R29.1 | length 9.9
  Bottom Layer w0.5: R28.2@25.298,22.771 25.926,22.771 27.704,20.993 R29.1@28.346,20.993
  Bottom Layer w1: ADC1.1@23.456,27.305 24.846,27.305 25.298,26.852 R28.2@25.298,22.771
M_VSA_Z: ADC1.2 R42.2 R43.1 | length 19.8
  Bottom Layer w0.3: R43.1@14.91,20.434 14.91,26.852 16.086,28.029 18.702,28.029 19.192,27.538 21.455,27.538 22.492,28.575 ADC1.2@23.456,28.575
  Bottom Layer w1: R43.1@14.91,20.434 16.756,20.434 16.782,20.46 R42.2@18.644,20.46
MISO: U1.22 W16.1 | length 52
  Routing 2 w0.3: W16.1@40.64,78.74 40.64,67.866 46.423,62.082 46.423,53.091 46.423,51.033 50.36,47.096 v1(54.526,42.931)
  Routing 2 w0.5: 46.423,53.091 50.36,49.154 50.36,47.096
  Bottom Layer w0.3: U1.22@52.253,44.166 53.312,44.166 54.526,42.952 v1(54.526,42.931)
MOSI: U1.21 W18.1 | length 95.7
  Routing 2 w0.3: W18.1@46.787,78.74 47.82,77.706 47.82,62.971 48.125,62.666 48.532,62.26 58.692,62.26 58.971,61.981 59.108,61.843 59.108,54.488 61.359,52.237 61.359,49.865 v1(54.983,43.489)
  Routing 2 w0.5: 47.82,77.706 48.125,77.402 48.125,62.666 48.125,62.387 48.532,61.981 58.971,61.981 62.146,61.981 62.73,61.396 62.73,51.236 61.359,49.865
  Bottom Layer w0.3: U1.21@52.253,44.666 53.806,44.666 v1(54.983,43.489)
Net*Battery1_1: *Battery1.1 *CS1.2 H1.17 R12.1 | length 85.3
  Top Layer w0.3: *Battery1.1@24.007,2.044 26.383,2.044 v1(27.983,2.113)
  Routing 1 w0.3: v1(27.983,2.113) 28.336,2.113 29.072,2.849 35.019,2.849 v1(48.968,16.799)
  Bottom Layer w0.3: v1(48.968,16.799) 52.794,16.799 ; R12.1@52.794,17.678 52.794,16.799 ; H1.17@85.852,27.508 86.835,26.525 86.835,16.87 86.327,16.362 75.964,16.362 74.236,14.635 64.284,14.635 61.13,11.481 *CS1.2@59.499,11.481 58.112,11.481 52.794,16.799
Net*Battery1_2: *Battery1.2 W3.2 | length 63.6
  Top Layer w0.3: v1(34.612,2.044) *Battery1.2@43.117,2.044
  Routing 2 w0.5: v1(19.177,17.48) v1(34.612,2.044)
  Bottom Layer w0.3: W3.2@0.279,32.537 -0.897,31.361 -0.897,21.569 3.193,17.48 v1(19.177,17.48)
Net*Battery2_3: *Battery2.3 *Battery2.4 | length 22.3
  Top Layer w0.3: *Battery2.3@35.59,77.318 *Battery2.3@35.59,79.475 ; *Battery2.4@52.896,77.318 54.712,79.133 *Battery2.4@54.712,79.375
  Top Layer w1: *Battery2.3@35.59,77.318 *Battery2.4@52.896,77.318
Net*Boost1_1: *Boost1.1 D5.1 L1.1 | length 20.8
  Top Layer w0.3: *Boost1.1@3.47,60.672 3.47,55.85 D5.1@4.151,55.169
  Top Layer w0.7: *Boost1.1@3.47,60.672 3.47,61.577 2.77,66.273 7.474,66.68 9.506,68.712 L1.1@9.506,70.485
Net*Boost1_3: *Boost1.3 C8.1 R21.2 R22.1 W5.2 | length 61.7
  Top Layer w0.3: v1(5.37,56.926) 5.37,57.163 5.37,57.653 ; *Boost1.3@5.37,60.672 5.37,57.653 ; R21.2@12.827,57.163 5.86,57.163 5.37,57.653
  Top Layer w0.5: 4.463,56.926 4.699,57.163 5.37,57.163 5.86,57.163
  Top Layer w0.7: C8.1@15.494,51.676 R22.1@15.494,55.461
  Top Layer w1: R21.2@12.827,57.163 12.827,56.621 12.954,56.494 13.835,56.494 14.869,55.461 R22.1@15.494,55.461
  Routing 1 w0.3: W5.2@-2.235,23.012 -3.462,24.239 -3.462,46.944 -0.922,49.484 -0.516,56.926 v1(5.37,56.926)
Net*Boost1_4: *Boost1.4 R19.1 | length 4
  Top Layer w0.7: *Boost1.4@5.37,62.362 *Boost1.4@5.37,62.822
  Top Layer w1: *Boost1.4@5.37,62.362 7.872,60.134 R19.1@8.052,60.134
Net*Boost1_5: *Boost1.5 *CS2.4 C3.2 C4.2 L1.2 R17.1 R19.2 | length 66.7
  Top Layer w0.3: L1.2@3.956,70.485 3.956,72.268 4.058,72.369 10.439,72.369 10.616,72.192 10.846,71.963 C3.2@10.846,62.776 10.846,62.348 10.189,62.348 9.092,61.25 9.092,58.755 8.77,58.433 R19.2@8.052,58.433 ; C4.2@15.291,62.776 18.821,62.776 R17.1@22.416,66.37 22.416,70.495 22.928,71.008 *CS2.4@23.908,71.008
  Top Layer w0.5: *Boost1.5@3.47,62.822 3.537,62.89 4.787,64.14 10.127,64.343 10.486,64.702 10.616,72.192 10.629,72.934 4.52,72.934 3.956,72.369 3.956,72.268
  Top Layer w0.7: *Boost1.5@3.47,62.822 3.537,62.822 *Boost1.5@3.537,62.89 ; C3.2@10.846,62.776 11.659,62.776 12.133,63.251 13.429,63.251 13.903,62.776 C4.2@15.291,62.776
Net*Boost2_1: *Boost2.1 D10.1 L2.1 | length 30.7
  Top Layer w0.3: *Boost2.1@3.698,20.515 3.698,19.537 4.181,19.055 6.52,19.055 6.977,19.055 8.679,20.756 8.679,20.782 9.111,21.214 12.108,21.214 12.762,20.559 D10.1@15.088,20.559
  Top Layer w0.7: *Boost2.1@3.698,20.515 3.698,20.96 3.421,20.96 2.837,21.544 2.837,28.405 4.032,29.6 L2.1@4.032,32.944 ; 6.52,19.055 8.679,21.214 9.111,21.214
Net*Boost2_3: *Boost2.3 C14.1 R35.2 R36.1 W7.2 | length 66.8
  Top Layer w0.3: *Boost2.3@5.598,20.515 5.598,21.054 v1(6.52,21.976) ; v1(6.52,23.304) 8.382,23.304 C14.1@9.652,23.304
  Top Layer w0.5: C14.1@9.652,23.304 15.002,23.304 16.738,21.569 16.738,19.537 14.186,16.985 R35.2@14.186,16.205
  Top Layer w0.7: R35.2@14.186,16.205 14.186,15.092 15.888,13.39 R36.1@15.888,12.573
  Routing 2 w0.3: W7.2@-2.235,54.661 -0.97,53.395 0.98,51.445 2.984,51.445 6.52,47.909 v1(6.52,23.304) v1(6.52,21.976)
  Routing 2 w0.5: -0.97,53.395 3.32,52.862 2.984,51.445
Net*Boost2_4: *Boost2.4 R33.1 | length 4.1
  Top Layer w0.7: R33.1@5.499,26.695 5.499,25.427 5.598,25.328 *Boost2.4@5.598,22.665
Net*Boost2_5: *Boost2.5 *CS4.4 C9.2 C10.2 L2.2 R31.1 R33.2 | length 63.7
  Top Layer w0.3: *Boost2.5@3.698,22.665 3.698,22.839 3.797,22.839 3.797,23.601 ; R33.2@3.797,26.695 3.797,23.601 ; L2.2@9.582,32.944 9.582,30.775 9.582,21.36 11.1,19.563 C10.2@11.1,18.453 C9.2@7.722,18.453 7.722,18.14 2.177,18.14 1.592,18.724 1.592,22.382 2.05,22.839 3.035,22.839 3.28,23.084 3.797,23.601
  Top Layer w0.7: L2.2@9.582,32.944 9.568,32.958 9.568,34.32 9.582,34.32 12.768,34.32 13.403,34.955 13.403,40.348 13.175,40.576 R31.1@12.294,40.576
  Top Layer w1: R31.1@12.294,40.576 12.294,42.346 12.376,42.429 *CS4.4@12.376,44.211
  Routing 2 w0.5: 9.582,18.453 9.582,30.775
Net*Boost3_1: *Boost3.1 D15.1 L3.1 | length 37.9
  Top Layer w0.3: L3.1@9.709,11.227 9.709,9.784 9.709,8.463 7.079,5.832 7.079,-0.986 7.485,-1.392 8.067,-1.392 *Boost3.1@8.067,-1.837 8.067,-1.85 8.067,-2.815 8.677,-3.424 12.029,-3.424 D15.1@14.565,-0.889
  Top Layer w0.5: *Boost3.1@8.067,-1.85 7.485,-1.85 7.473,-1.837 6.926,-1.291 6.926,7.001 L3.1@9.709,9.784
  Top Layer w0.7: 7.473,-1.837 *Boost3.1@8.067,-1.837
Net*Boost3_3: *Boost3.3 C20.1 R49.2 R50.1 W9.2 | length 73.6
  Top Layer w0.5: W9.2@0.279,36.754 0.279,35.709 1.821,34.168 1.821,16.464 3.294,14.991 9.593,14.991 11.702,12.882 11.702,7.887 11.956,7.633 C20.1@12.802,7.633
  Top Layer w0.7: *Boost3.3@9.967,-1.837 9.967,-1.273 11.854,0.614 13.437,0.614 ; C20.1@12.802,7.633 12.802,1.249 13.437,0.614 ; R50.1@29.007,-0.495 28.347,-0.495 28.059,-0.783 28.059,-1.596 27.221,-2.434 16.883,-2.434 16.451,-2.002 16.451,0.182 16.02,0.614 13.437,0.614
  Top Layer w1: R50.1@29.007,-0.495 29.007,1.275 29.032,1.3 R49.2@29.032,3.111
Net*Boost3_4: *Boost3.4 R47.1 | length 4.8
  Top Layer w0.7: R47.1@9.639,4.928 9.639,3.126 9.967,2.799 *Boost3.4@9.967,0.313
Net*Boost3_5: *Boost3.5 *CS6.4 C15.2 C16.2 L3.2 R45.1 R47.2 | length 42.2
  Top Layer w0.5: C16.2@19.177,4.991 19.177,6.126 25.418,6.558 v1(25.418,7.634)
  Top Layer w0.7: R47.2@7.938,4.928 7.938,1.912 8.067,1.783 *Boost3.5@8.067,0.313
  Top Layer w1: L3.2@4.159,11.227 4.159,5.416 4.648,4.928 R47.2@7.938,4.928 8.176,4.928 9.365,3.738 12.532,3.738 13.835,5.042 C15.2@16.739,5.042 17.925,5.042 17.975,4.991 C16.2@19.177,4.991
  Bottom Layer w0.5: v1(25.418,7.634) *CS6.4@27.426,9.642 29.02,8.048 R45.1@29.02,6.147
Net*Buck1_1: *Buck1.1 C26.2 D17.2 L4.1 | length 95.6
  Top Layer w0.3: *Buck1.1@32.499,21.641 34.308,21.641 ; 46.286,23.058 44.869,21.641 35.31,21.641 ; D17.2@53.442,21.651 47.237,21.651 ; L4.1@77.978,41.421 74.973,41.421 65.18,31.628 60.908,31.628 60.345,32.191 55.482,32.191 51.638,28.346 51.638,27.508 46.438,22.308 46.571,21.651 ; 34.308,21.641 34.809,21.14 ; 34.308,21.641 35.31,21.641 ; 34.809,21.14 34.714,21.045 34.714,19.283 35.476,18.521 35.476,12.603 36.975,11.104 46.093,11.104 46.571,11.582 C26.2@46.571,18.872 46.571,20.985 ; 34.809,21.14 35.31,21.641 ; 46.571,20.985 47.237,21.651 ; 46.571,20.985 46.571,21.651 ; 46.571,21.651 47.237,21.651
Net*Buck1_2: *Buck1.2 C21.1 C22.2 C23.2 W11.2 | length 95.1
  Top Layer w0.3: *Buck1.2@32.499,22.911 v1(34.46,22.911)
  Top Layer w0.5: C22.2@23.749,13.652 23.749,14.094 25.418,14.094 25.859,13.652 C23.2@27.102,13.652
  Top Layer w1: C21.1@19.964,12.827 21.684,12.827 22.509,13.652 C22.2@23.749,13.652 ; C23.2@27.102,13.652 27.805,13.652 28.128,16.676 28.212,17.454
  Routing 1 w0.3: W11.2@0.279,50.267 0.279,48.018 -0.973,46.766 -0.973,17.099 -0.541,16.667 v1(28.216,16.667)
  Routing 1 w0.5: v1@28.128,16.676 28.207,16.676 v1(28.216,16.667)
  Routing 2 w0.3: v1(28.216,16.667) v1(34.46,22.911)
  Routing 2 w1: 28.212,17.454 33.668,22.911 v1(34.46,22.911)
Net*Buck1_3: *Buck1.3 C26.1 | length 15.5
  Top Layer w0.3: *Buck1.3@32.499,24.181 36.34,24.181 38.372,22.149 38.372,20.985 43.375,20.579 43.604,19.329 C26.1@44.869,18.872
Net*Buck1_5: *Buck1.5 R62.1 | length 4.5
  Top Layer w1: *Buck1.5@32.499,26.721 34.587,26.721 34.803,26.937 R62.1@36.906,26.937
Net*Buck1_6: *Buck1.6 R63.1 R64.2 | length 36.2
  Top Layer w0.3: *Buck1.6@32.499,27.991 33.8,27.991 35.38,29.571 v1(42.029,29.571) ; v1(42.029,28.638) R63.1@49.505,28.638 ; v1(43.164,13.881) R64.2@45.593,13.881
  Routing 2 w0.5: v1(42.029,29.571) v1(42.029,28.638) 42.029,15.016 v1(43.164,13.881)
Net*Buck1_7: *Buck1.7 C27.2 | length 19.1
  Top Layer w1: *Buck1.7@32.499,29.261 33.655,29.261 34.866,30.472 v1(34.866,31.577) ; v1(35.451,20.452) 36.335,19.567 C27.2@36.335,18.694
  Routing 1 w1: v1(34.866,31.577) 33.647,30.358 33.647,21.112 34.308,20.452 v1(35.451,20.452)
Net*Buck2_1: *Buck2.1 C33.2 D18.2 L5.1 | length 86.7
  Top Layer w0.3: v1(47.338,45.339) C33.2@45.784,45.339 45.784,47.38 45.784,48.432 45.28,48.935 ; v1(53.061,51.059) D18.2@53.061,48.935 v1(50.934,48.935) 45.28,48.935 ; L5.1@77.876,59.887 78.656,59.887 v1(78.656,58.247) ; 31.763,48.658 *Buck2.1@31.763,49.149 ; 31.763,48.658 31.742,48.658 31.742,49.149 *Buck2.1@31.763,49.149 ; 31.763,48.658 44.506,48.658 44.783,48.935 45.28,48.935 ; *Buck2.1@31.763,49.149 42.283,49.149 45.067,49.149 45.28,48.935
  Top Layer w0.5: 42.283,49.149 42.497,48.935 44.783,48.935 ; 45.28,48.935 44.783,48.437 44.783,48.381 45.784,47.38
  Routing 1 w0.5: v1(47.338,45.339) v1(50.934,48.935) ; v1(53.061,51.059) 56.812,51.059 58.692,52.938 58.692,56.977 59.788,58.073 78.482,58.073 v1(78.656,58.247)
Net*Buck2_2: *Buck2.2 C28.1 C29.2 C30.2 W13.2 | length 64.7
  Top Layer w0.3: C29.2@23.876,41.796 24.96,41.796 25.443,41.313 25.443,41.076 ; v1(25.443,34.549) 25.443,41.076 ; C30.2@27.788,41.796 26.162,41.796 25.443,41.076
  Top Layer w1: C28.1@19.533,41.123 21.354,41.123 22.027,41.796 C29.2@23.876,41.796 ; 24.96,41.796 26.162,41.796 ; C30.2@27.788,41.796 28.397,41.796 33.723,47.121 33.723,50.093 *Buck2.2@31.763,50.419
  Routing 1 w0.3: W13.2@0.229,18.796 14.542,18.796 25.443,29.697 v1(25.443,34.549)
Net*Buck2_3: *Buck2.3 C33.1 | length 16.9
  Top Layer w0.3: *Buck2.3@31.763,51.689 v1(34.689,51.689) ; v1(43.604,46.639) 44.082,46.161 C33.1@44.082,45.339
  Routing 1 w0.3: v1(34.689,51.689) 34.689,49.103 37.152,46.639 v1(43.604,46.639)
Net*Buck2_5: *Buck2.5 R72.1 | length 7.7
  Top Layer w0.3: *Buck2.5@31.763,54.229 32.809,54.229 33.573,53.465 v1(33.573,53.09) ; v1(36.601,53.09) R72.1@36.601,55.283
  Routing 1 w0.5: v1(33.573,53.09) v1(36.601,53.09)
Net*Buck2_6: *Buck2.6 R73.1 R74.2 | length 27.8
  Top Layer w0.3: *Buck2.6@31.763,55.499 33.495,55.499 33.929,55.064 33.929,53.462 36.511,50.881 38.143,50.881 v1(38.575,51.313) ; R74.2@49.632,51.803 49.632,52.98 ; v1@48.442,54.178 R73.1@48.641,55.105 v1@48.641,54.377 ; v1@48.442,54.178 v1(48.438,54.174) v1@48.641,53.971 ; v1@48.442,54.178 v1@48.641,54.377 ; v1@48.442,54.178 v1@48.641,53.979 ; v1@48.641,53.971 49.632,52.98 ; v1@48.641,53.971 v1@48.641,53.979 ; v1@48.641,53.979 48.641,54.174 v1@48.641,54.377 ; v1@48.641,53.979 49.632,52.988 49.632,52.98
  Routing 1 w0.3: v1(38.575,51.313) 45.576,51.313 v1(48.438,54.174)
Net*Buck2_7: *Buck2.7 C34.2 | length 14.7
  Top Layer w0.3: *Buck2.7@31.763,56.769 35.12,56.769 35.603,53.243 v1(37.254,51.592) ; 37.254,47.574 37.275,47.553 C34.2@37.275,46.126
  Routing 1 w0.5: 37.254,47.574 v1(37.254,51.592)
Net*CS1_5: *CS1.5 U1.85 | length 79.2
  Routing 2 w0.5: v1(42.715,54.894) 41.343,56.266 ; v1(48.76,9.555) 48.76,24.414 34.13,39.044 34.13,54.03 ; 34.13,54.03 33.901,54.259 33.901,55.453 34.13,55.681 ; 34.13,54.03 34.13,55.681 ; 34.13,55.681 34.13,56.113 34.536,56.52 41.089,56.52 41.343,56.266 ; 34.13,55.681 34.714,56.266 41.343,56.266
  Bottom Layer w0.3: v1(42.715,54.894) 42.95,54.894 43.153,55.097 U1.85@43.153,56.266 ; v1(48.76,9.555) 49.374,8.941 *CS1.5@54.699,8.941
Net*CS1_6: *CS1.6 C2.2 Vref1.1 | length 14.4
  Routing 2 w0.7: v1(50.307,4.558) 53.18,7.431 v1(53.18,10.211)
  Bottom Layer w0.3: Vref1.1@47.269,7.808 49.844,7.808 50.307,7.345 C2.2@50.307,5.74
  Bottom Layer w0.7: v1(50.307,4.558) C2.2@50.307,5.74 ; v1(53.18,10.211) *CS1.6@54.699,10.211
Net*CS1_7: *CS1.7 *KillSW1.5 *KillSW1.6 *KillSW1.7 *KillSW1.8 *SepSW1.1 *SepSW1.3 C1.2 R9.1 R12.2 R13.1 | length 290.3
  Top Layer w0.3: v1(51.092,18.724) 53.612,16.205 53.612,14.1 55.117,12.595 ; v1(56.231,11.481) 55.664,12.047 ; *SepSW1.3@56.312,14.567 56.923,13.847 ; *SepSW1.1@58.852,14.567 58.852,12.614 58.285,12.047 57.472,12.047 ; R13.1@62.179,17.793 62.959,17.793 63.213,18.047 63.213,19.232 64.661,20.68 ; 72.39,20.68 75.413,23.703 ; v1(75.413,23.157) 75.413,23.703 ; *KillSW1.8@75.413,25.642 75.413,23.703 ; 55.117,12.595 55.676,12.595 ; 55.117,12.595 55.664,12.047 ; 55.664,12.047 55.745,12.047 ; 55.664,12.047 55.664,12.583 55.676,12.595 ; 55.676,12.595 55.847,12.766 ; 55.745,12.047 55.847,12.149 55.847,12.766 ; 55.745,12.047 57.472,12.047 ; 55.847,12.766 55.847,12.771 56.923,13.847 ; 55.847,12.766 56.923,13.847 ; 56.923,13.847 56.923,12.597 57.472,12.047
  Top Layer w0.7: *SepSW1.1@58.852,14.567 58.852,15.786 59.098,16.032 60.859,17.793 R13.1@62.179,17.793
  Top Layer w1: *SepSW1.1@58.852,14.567 59.098,16.032 ; *KillSW1.8@75.413,25.642 *KillSW1.7@76.683,25.642 *KillSW1.6@77.953,25.642 *KillSW1.5@79.223,25.642
  Routing 1 w0.3: v1(58.209,8.336) 62.248,8.336 63.01,7.574 69.36,7.574 72.001,10.215 72.001,18.801 v1(74.363,21.163)
  Routing 2 w0.3: v1(49.751,62.87) 55.588,62.87 62.273,62.87 62.349,62.87 63.01,62.209 63.01,62.133 63.01,60.507 63.01,35.56 ; v1(74.363,21.163) 63.238,32.288 63.01,32.517 63.01,35.56 ; v1(75.413,23.157) 64.508,34.061 63.238,35.331 63.01,35.56
  Routing 2 w0.5: 49.759,62.509 55.228,62.509 55.588,62.87 ; 49.954,68.504 55.588,62.87 ; 62.273,62.87 63.01,62.133 63.238,61.904 63.238,60.279 ; 63.221,17.793 66.108,20.68 ; 72.39,20.68 66.108,20.68 ; 74.482,22.772 64.508,32.745 64.508,34.061 64.508,59.009 63.238,60.279 ; 55.588,62.87 57.087,61.371 62.146,61.371 63.01,60.507 63.238,60.279 ; 63.238,60.279 63.238,35.331 63.238,32.288 63.238,31.932 71.087,24.084 71.087,22.382 70.528,21.823 65.804,21.823 64.661,20.68 66.108,20.68
  Bottom Layer w0.3: R9.1@49.721,67.437 49.721,62.9 v1(49.751,62.87) ; R12.2@51.092,17.678 v1(51.092,18.724) ; *CS1.7@54.699,11.481 v1(56.231,11.481) 58.204,9.508 v1@58.204,8.331 ; C1.2@58.204,5.69 v1@58.204,8.331 ; v1(58.209,8.336) v1@58.204,8.331
Net*CS2_3: *CS2.3 R16.1 | length 5.3
  Top Layer w0.7: R16.1@17.602,67.704 18.203,67.704 *CS2.3@21.508,71.008
Net*CS3_1: *CS3.1 R27.1 U1.89 | length 84.5
  Routing 2 w0.3: v1(26.002,75.671) 32.054,75.671 45.92,61.805 45.923,61.802 v1(45.923,50.827)
  Routing 2 w0.5: 32.054,75.671 32.961,75.671 45.92,62.712 45.92,61.805 ; v1@45.923,50.571 v1(45.923,50.827)
  Bottom Layer w0.3: R27.1@13.97,67.729 21.87,67.729 26.002,71.861 v1(26.002,75.671) ; U1.89@45.153,56.266 45.153,51.597 v1(45.923,50.827)
  Bottom Layer w0.5: *CS3.1@10.725,67.727 10.725,68.18 10.94,68.394 13.431,68.394 13.97,67.855 R27.1@13.97,67.729
Net*CS3_3: *CS3.3 R25.1 | length 4
  Bottom Layer w0.5: *CS3.3@10.725,65.827 10.841,65.827 10.841,63.776 10.757,63.692 R25.1@10.757,61.976
Net*CS3_4: *CS3.4 D6.1 R26.1 | length 14.9
  Routing 1 w0.5: v1(7.22,62.844) v1(11.879,62.844)
  Bottom Layer w0.5: D6.1@4.547,65.517 v1(7.22,62.844) ; v1(11.879,62.844) 12.659,62.065 R26.1@14.122,62.065
  Bottom Layer w1: D6.1@4.547,65.517 6.266,65.517 6.575,65.827 *CS3.4@8.325,65.827
Net*CS4_3: *CS4.3 R30.1 | length 4.5
  Top Layer w0.7: R30.1@7.823,40.576 7.823,42.085 9.949,44.211 *CS4.3@9.976,44.211
Net*CS5_1: *CS5.1 R41.1 U1.88 | length 41.5
  Bottom Layer w0.3: R41.1@14.173,53.734 27.356,53.734 34.727,61.105 38.376,61.105 38.821,60.66 44.171,60.66 44.653,60.177 U1.88@44.653,56.266
  Bottom Layer w1: *CS5.1@11.081,54.442 14.015,54.442 14.173,54.284 R41.1@14.173,53.734
Net*CS5_3: *CS5.3 R39.1 | length 4.4
  Bottom Layer w1: R39.1@11.036,48.158 11.036,50.322 11.081,50.366 *CS5.3@11.081,52.542
Net*CS5_4: *CS5.4 D11.1 R40.1 | length 14
  Routing 1 w0.5: v1(7.541,52.659) v1(11.8,48.4)
  Bottom Layer w0.5: D11.1@4.75,49.49 7.541,52.281 v1(7.541,52.659) ; v1(11.8,48.4) R40.1@14.275,48.4
  Bottom Layer w1: v1(7.541,52.659) 7.657,52.542 *CS5.4@8.681,52.542
Net*CS6_3: *CS6.3 R44.1 | length 8.4
  Bottom Layer w1: *CS6.3@29.826,9.642 29.826,8.601 30.675,7.752 35.065,7.752 35.471,7.345 R44.1@35.471,6.147
Net*CS7_1: *CS7.1 R55.1 U1.87 | length 112
  Routing 2 w0.3: 43.096,17.556 43.096,29.367 32.976,39.487 32.976,57.194 33.977,58.196 v1(43.807,58.196)
  Routing 2 w0.5: 32.976,39.487 32.276,40.187 32.276,56.494 32.976,57.194 32.976,57.739 33.433,58.196 33.977,58.196
  Bottom Layer w0.3: *CS7.1@10.598,13.574 12.057,13.574 12.842,12.789 R55.1@14.326,12.789 21.387,12.789 26.154,17.556 43.096,17.556 ; v1(43.807,58.196) 44.153,57.85 U1.87@44.153,56.266
Net*CS7_3: *CS7.3 R53.1 | length 7.1
  Bottom Layer w1: *CS7.3@10.598,11.674 10.598,9.211 12.583,7.226 R53.1@14.376,7.226
Net*CS7_4: *CS7.4 D16.1 R54.1 | length 8.8
  Bottom Layer w1: D16.1@4.42,11.521 6.215,11.521 6.368,11.674 *CS7.4@8.198,11.674 8.198,9.206 8.192,9.199 R54.1@8.192,6.756
Net*CS8_1: *CS8.1 R68.1 U1.95 | length 44.2
  Top Layer w0.3: R68.1@56.769,29.375 57.785,29.375 ; *CS8.1@59.455,25.359 59.454,25.359 59.454,28.402 ; 57.785,29.375 v1(59.454,31.043) 59.454,28.402 ; 57.785,29.375 58.48,29.375 59.454,28.402
  Bottom Layer w0.3: U1.95@48.153,56.266 48.153,55.097 48.407,54.843 49.751,54.843 50.208,54.386 50.208,43.235 54.78,38.663 54.78,31.628 55.364,31.043 v1(59.454,31.043)
Net*CS8_3: *CS8.3 R66.1 | length 2.7
  Top Layer w0.3: R66.1@56.82,23.558 58.082,23.558 58.181,23.459 *CS8.3@59.455,23.459
Net*CS8_4: *CS8.4 R67.1 U1.94 W12.1 | length 150.6
  Top Layer w0.3: v1(60.368,36.276) 60.978,36.276 62.883,34.371 62.883,29.451 62.756,29.324 R67.1@62.027,29.324
  Top Layer w0.7: *CS8.4@61.855,23.459 63.086,24.69 62.984,26.903 62.027,28.478 R67.1@62.027,29.324
  Routing 1 w0.5: v1(26.967,44.683) 34.689,44.683 39.235,40.137 v1(56.507,40.137) v1(60.368,36.276)
  Routing 2 w0.5: W12.1@0.432,73.431 5.977,78.977 10.75,78.977 11,79.227 16.579,79.227 18.941,76.865 22.014,76.433 22.014,72.699 24.85,69.864 24.85,46.8 v1(26.967,44.683) ; 47.592,51.922 47.592,49.255 56.507,40.34 v1(56.507,40.137) ; v1(47.653,48.991) v1(56.507,40.137) ; 56.507,36.276 v1(56.507,40.137)
  Bottom Layer w0.3: v1(47.653,48.991) U1.94@47.653,56.266
Net*CS9_1: *CS9.1 R78.1 U1.91 | length 36.5
  Top Layer w0.3: *CS9.1@59.557,45.959 60.266,45.959 60.266,51.236 ; R78.1@61.925,51.854 60.884,51.854 ; 60.266,51.236 60.884,51.854 ; 60.266,51.236 v1(60.266,52.43) 60.884,51.854
  Routing 2 w0.3: v1(47.846,58.018) 49.021,59.193 53.503,59.193 54.678,58.018 v1(60.266,52.43)
  Routing 2 w0.5: v1@47.643,58.018 v1(47.846,58.018) 54.678,58.018 ; v1(60.266,52.43) 60.843,51.854
  Bottom Layer w0.3: U1.91@46.153,56.266 46.153,57.332 46.839,58.018 v1(47.846,58.018)
Net*CS9_3: *CS9.3 R76.1 | length 3.1
  Top Layer w0.3: R76.1@56.566,43.929 58.952,43.929 58.96,43.921 59.098,44.059 *CS9.3@59.557,44.059